# Altium PCB 电流脉冲检测.PcbDoc
Units mil, origin at the board's own origin, x right, y up, seen from the top; angles counter-clockwise.
Board outline 2110 x 745 mil, 2 copper layers (Top Layer, Bottom Layer); 16 components, 10 nets, 38 pads, 15 vias.
Unrouted connection lines stored in the file: 7.
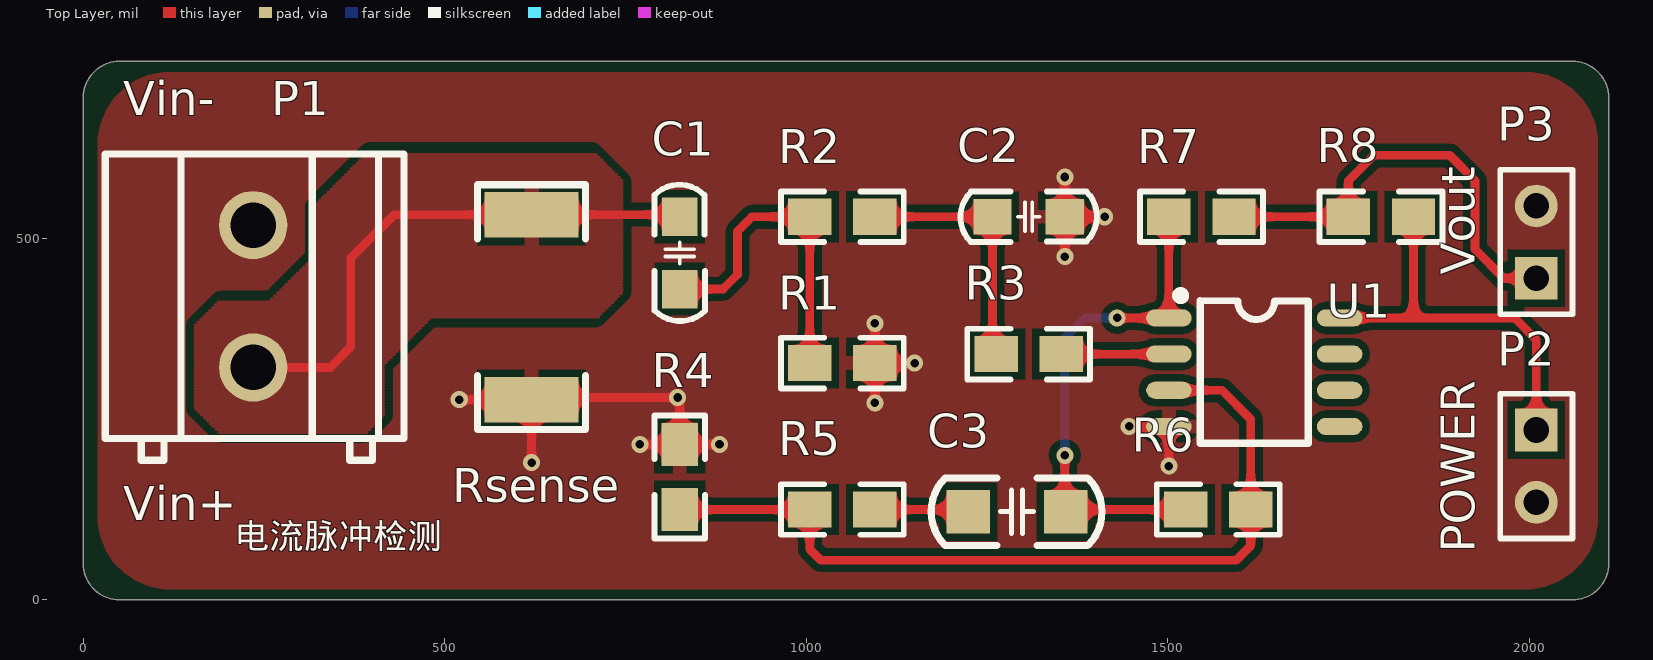
[diagram p0: Top Layer view]
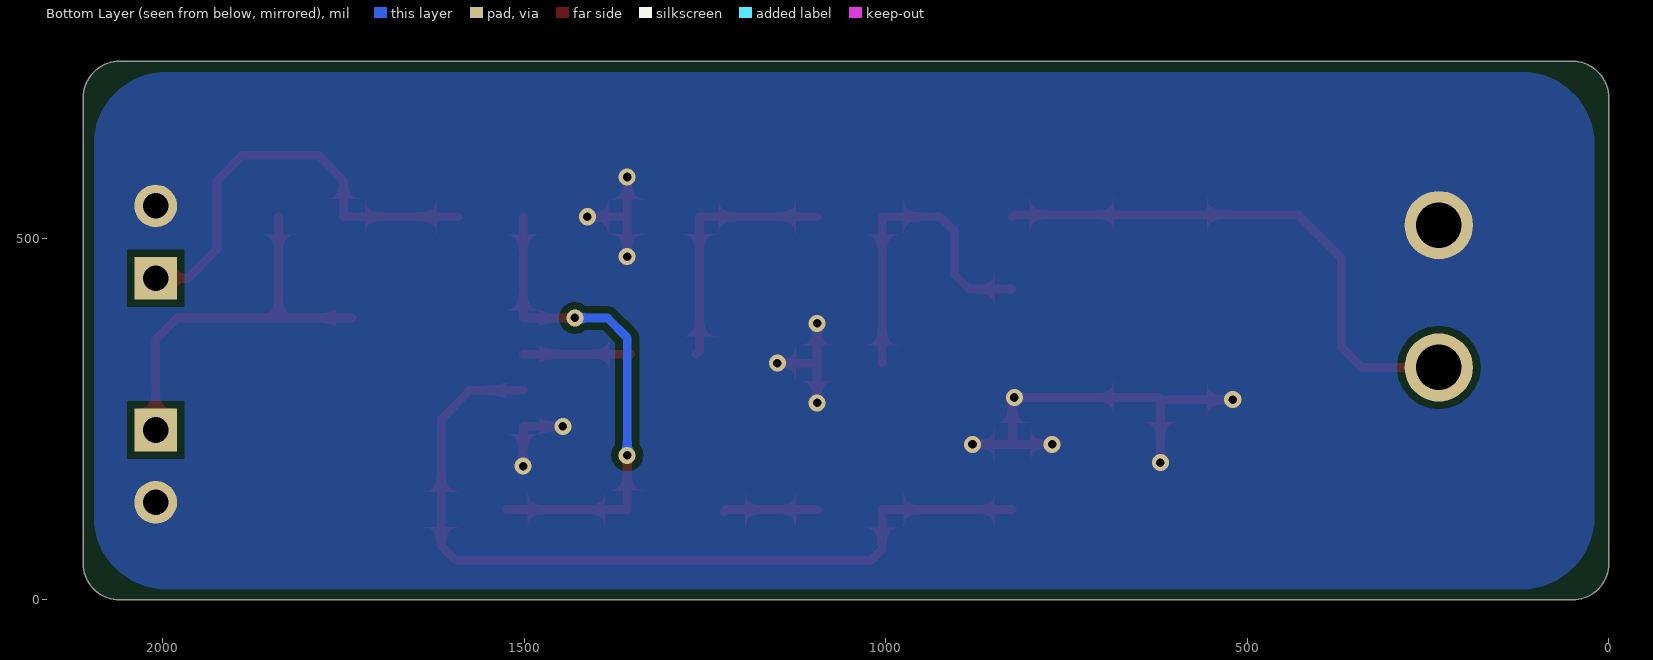
[diagram p1: Bottom Layer view, seen from below]
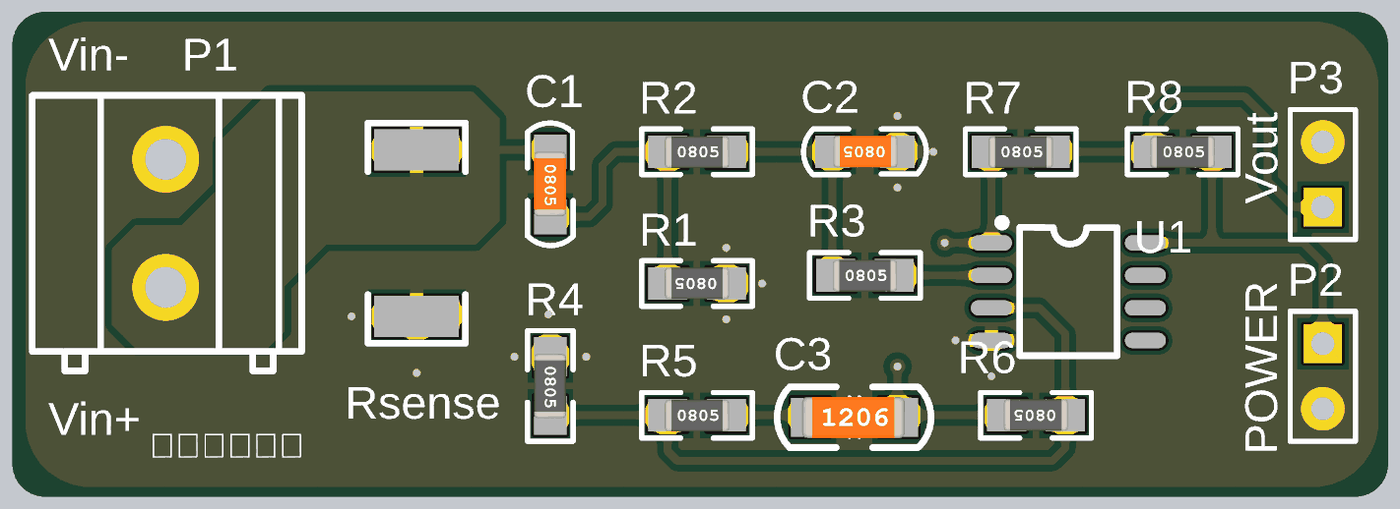
[diagram p2: 3D render of the assembled board from above, using the file's embedded part models]

## Layer stack, top to bottom
Top Solder: solder mask 0.4, Solder Resist, Dk 3.5
Top Layer: signal copper 1.4
Dielectric 1: dielectric 12.6, FR-4, Dk 4.8
Bottom Layer: signal copper 1.4
Bottom Solder: solder mask 0.4, Solder Resist, Dk 3.5

## Board outline
0,50 0,695 cw(c50,695) 50,745 2060,745 cw(c2060,695) 2110,695 2110,50 cw(c2060,50) 2060,0 50,0 cw(c50,50)

## Design rules (kind name [scope] priority, off if disabled: settings)
Clearance [All] p1: gap=10 ignorepadtopadclearanceinfootprint=FALSE except(0: Arc-Text Arc-Hole Track-Text Track-Hole SMDPad-Text SMDPad-Hole THPad-Text THPad-Hole Via-Text Via-Hole Fill-Text Fill-Hole Poly-Text Poly-Hole Region-Text Region-Hole Text-Text Text-Hole)
PolygonConnect [All] p1: thpad.connectstyle=Direct thpad.reliefconductorwidth=20 thpad.reliefentries=4 thpad.polygonreliefangle="90 Angle" thpad.airgapwidth=10 smdpad.connectstyle=Relief smdpad.reliefconductorwidth=20 smdpad.reliefentries=4 smdpad.polygonreliefangle="90 Angle" smdpad.airgapwidth=10 via.connectstyle=Direct via.reliefconductorwidth=20 via.reliefentries=4 via.polygonreliefangle="90 Angle" via.airgapwidth=10
RoutingVias [All] p1: holewidth=11.81 width=23.62 viastyle="Through Hole" minholewidth=11.81 minwidth=23.62 maxholewidth=11.81 maxwidth=23.62
SolderMaskExpansion [All] p1: expansion=4
Width Singal [InNetClass('Singal')] p1: maxlimit=12 minlimit=12 preferedwidth=12
30 further rules are at their usual default settings.

## Components (designator, comment, footprint, x,y, rotation, side; value= is the part's Value field where it differs from the comment)
C1 "1uF" 0805C 830,530 r270 top
C2 "1uF" 0805C 1357.66,525 r180 top
C3 "51nF" 1206C 1225,125 r0 top
P1 "KF128-5.0-2P" CONN-TH_P5.00_KF128-5.0-2P 235,420 r90 top
P2 "POWER" HDR1X2 2010,235 r270 top
P3 "GPIO" HDR1X2 2010,445 r90 top
R1 "20k" 0805R 1095,327.5 r180 top
R2 "2k" 0805R 1005,530 r0 top
R3 "2k" 0805R 1262.66,340 r0 top
R4 "100" 0805R 825,215 r270 top
R5 "1k" 0805R 1005,125 r0 top
R6 "200k" 0805R 1615,125 r180 top
R7 "1k" 0805R 1501.67,530 r0 top
R8 "1k" 0805R 1750,530 r0 top
Rsense "0.1R" R2512 620,405 r270 top
U1 "LM393_C400839" SOP-8_L4.9-W3.9-P1.27-LS6.0-BL 1619.78,315 r270 top

## Footprints (in the part's own frame and the unit in brackets; to place one, negate y for a bottom-side part, rotate by r counter-clockwise, add the part's x,y. Pads: shape width x height; smd on the part's side, far side on the other; paste and mask are expansions set on the pad)
0805C [mm]
  rect 1.35x1.25 smd: 1(0,-0.127) 2(2.54,-0.127)
  silkscreen extent -1.12,-1.02 3.66,0.76, body extent 0,-0.76 2.51,0.48, height 0.79
0805R [mil]
  rect 60x50 smd: 1(0,0) 2(90,0)
  silkscreen extent -40,-35 130,35, body extent -4,-25 94,24, height 31
1206C [mil]
  rect 60x60 smd: 1(-1,-3) 2(134,-3)
  silkscreen extent -52,-50 184,44, body extent -14,-35 144,28, height 60
CONN-TH_P5.00_KF128-5.0-2P [mm]
  round 2.4 hole 1.6: 1(-2.5,0) 2(2.5,0)
  silkscreen extent -5.76,-5.3 5,5.2
HDR1X2 [mm] "Connector; Header; 2 Position"
  rect 1.5x1.5 hole 0.9: 1(0,0)
  round 1.5 hole 0.9: 2(2.54,0)
  silkscreen extent -1.27,-1.27 3.81,1.27, body extent -1.27,-1.3 3.81,1.24, height 8.54
R2512 [mm]
  rect 1.6x3.3 smd: 1(-3.25,0) 2(3.25,0)
  silkscreen extent -4.3,-1.9 4.3,1.9
SOP-8_L4.9-W3.9-P1.27-LS6.0-BL [mm]
  oval 0.6x1.598 smd: 1(-1.905,-3) 2(-0.635,-3) 3(0.635,-3) 4(1.905,-3) 5(1.905,3) 6(0.635,3) 7(-0.635,3) 8(-1.905,3)
  silkscreen extent -2.84,-2.74 2.5,1.9

## Part data
C1 C2: library part CAP, "Capacitor"
C3: library part cap_1206
P1: library part KF128-2P, BOM_Manufacturer="Cixi Kefa Elec", BOM_Manufacturer Part=KF128-5.0-2P, BOM_Supplier=LCSC, BOM_Supplier Part=C474950, Contributor=LCSC, spicePre=U, spiceSymbolName=KF128-5.0-2P
P2 P3: library part "Header 2", "Header, 2-Pin", LatestRevisionDate=17-Jul-2002, LatestRevisionNote="Re-released for DXP Platform.", Publisher="Altium Limited"
R1 R2 R3 R4 R5 R6 R7 R8: library part Res1, "Resistor"
Rsense: library part Rsense
U1: library part LM393_A, BOM_Manufacturer=IDCHIP, BOM_Manufacturer Part=LM393, BOM_Supplier=LCSC, BOM_Supplier Part=C400839, spicePre=U, spiceSymbolName=LM393_C400839, subpart_no=2

## Via types
v1: diameter 23.62, hole 11.81, Top Layer to Bottom Layer, tented both sides, 15 vias

## Nets (pads, with @x,y where several pads share a name; then routed paths per layer and width w, separated by ;. In a path a pad name is that pad's centre, name@x,y a point inside that pad or via, vN(x,y) a via of type N, cw(c..) or ccw(c..) an arc to the next point about the centre after c; other vN are vias at no path point)
+5: P2.1 R8.2 U1.8 | length 549.5
  Top Layer w12: U1.8 1840,390 ; R8.2 1840,390 ; P2.1 2010,360 1980,390 1840,390
GND: C2.1 P1.2 P2.2 P3.2 R1.1 R4.1 Rsense.2 U1.4 | length 1007.5
  Top Layer w12: v1(520,277.05) Rsense.2 ; v1(620,190) Rsense.2 ; v1(770,215) R4.1 ; v1(880,215) R4.1 ; v1(1095,272.5) R1.1 ; v1(1095,382.5) R1.1 ; v1(1150,327.5) R1.1 ; v1(1357.66,475) C2.1 ; v1(1357.66,585) C2.1 ; v1(1412.66,530) C2.1 ; v1(1446.67,240) U1.4 v1(1501.67,185) ; Rsense.2 cw(c622.95,277.05) 622.95,280 v1(822.05,280) cw(c822.05,277.05) 825,277.05 R4.1
NetC1_1: C1.1 P1.1 Rsense.1 | length 750.8
  Top Layer w12: P1.1 341.58,321.58 370,350 370,472.95 430,532.95 Rsense.1 822.05,532.95 C1.1
NetC1_2: C1.2 R1.2 R2.1 | length 459.1
  Top Layer w12: C1.2 885,430 905,450 905,510 925,530 R2.1 R1.2
NetC2_2: C2.2 R2.2 R3.1 | length 354.7
  Top Layer w12: R2.2 C2.2 1257.66,345 R3.1
NetC3_1: C3.1 R5.2 | length 130.2
  Top Layer w12: R5.2 1221,125 C3.1
NetC3_2: C3.2 R6.2 R7.1 U1.1 | length 700.3
  Top Layer w12: v1(1357.66,200) 1357.66,125 R6.2 ; v1(1430,390) U1.1 R7.1
  Bottom Layer w12: v1(1357.66,200) 1357.66,362.66 1385,390 v1(1430,390)
NetP3_1: P3.1 R7.2 R8.1 | length 608.9
  Top Layer w12: R7.2 R8.1 1750,580 1785,615 1890,615 1925,580 1925,485 1965,445 P3.1
NetR3_2: R3.2 U1.2 | length 149
  Top Layer w12: R3.2 U1.2
NetR4_2: R4.2 R5.1 R6.1 U1.3 | length 1164.4
  Top Layer w12: R4.2 R5.1 1005,70 1020,55 1595,55 1615,75 R6.1 1615,250 1575,290 U1.3
pads on no net: U1.5 U1.6 U1.7

## Polygon pours and split planes (outlines as drawn)
GND on Bottom Layer "Bottom Layer-GND" (solid, remove dead copper, pour order 6): 1995,730 cw(c1995,630) 2095,630 2095,115 cw(c1995,115) 1995,15 120,15 cw(c120,115) 20,115 20,630 cw(c120,630) 120,730
no net on Bottom Layer "Bottom Layer-No Net" (solid, remove dead copper, pour order 0): 120,750
GND on Top Layer "Bottom Layer-GND" (solid, remove dead copper, pour order 20): 1995,730 cw(c1995,630) 2095,630 2095,115 cw(c1995,115) 1995,15 120,15 cw(c120,115) 20,115 20,630 cw(c120,630) 120,730
NetC1_1 on Top Layer (hatched Horizontal grid 4 track 5, remove dead copper, pour order 16): 155,380 190,415 260,415 320,475 320,545 395,620 705,620 745,580 745,425 710,390 480,390 415,325 415,255 390,230 190,230 155,265
no net on Top Layer (hatched Horizontal grid 4 track 5, remove dead copper, pour order 12): 160,405

## Silkscreen, mask and mechanical layers (free items; w line width, h text height)
Top Overlay:
  text "Vin-" at 55,655 h80
  text "Vout" at 1940,450 h80 r90
  text "Vin+" at 55,95 h80
  text "POWER" at 1939.93,65 h80 r90
  text "电流脉冲检测" at 210,60 h60
Mechanical 1:
  lines w10: 0,50 ccw(c50,50) 50,0 2060,0 ccw(c2060,50) 2110,50 2110,695 ccw(c2060,695) 2060,745 225,745 50,745 ccw(c50,695) 0,695 0,50

## Dimensions
50,0 to 50,745 on Mechanical 1
0,695 to 2110,695 on Mechanical 1